# EAGLE board acciedent_vehicle _located_based_on_gps_and_gsm_vibration sensor (EAGLE 6.1)
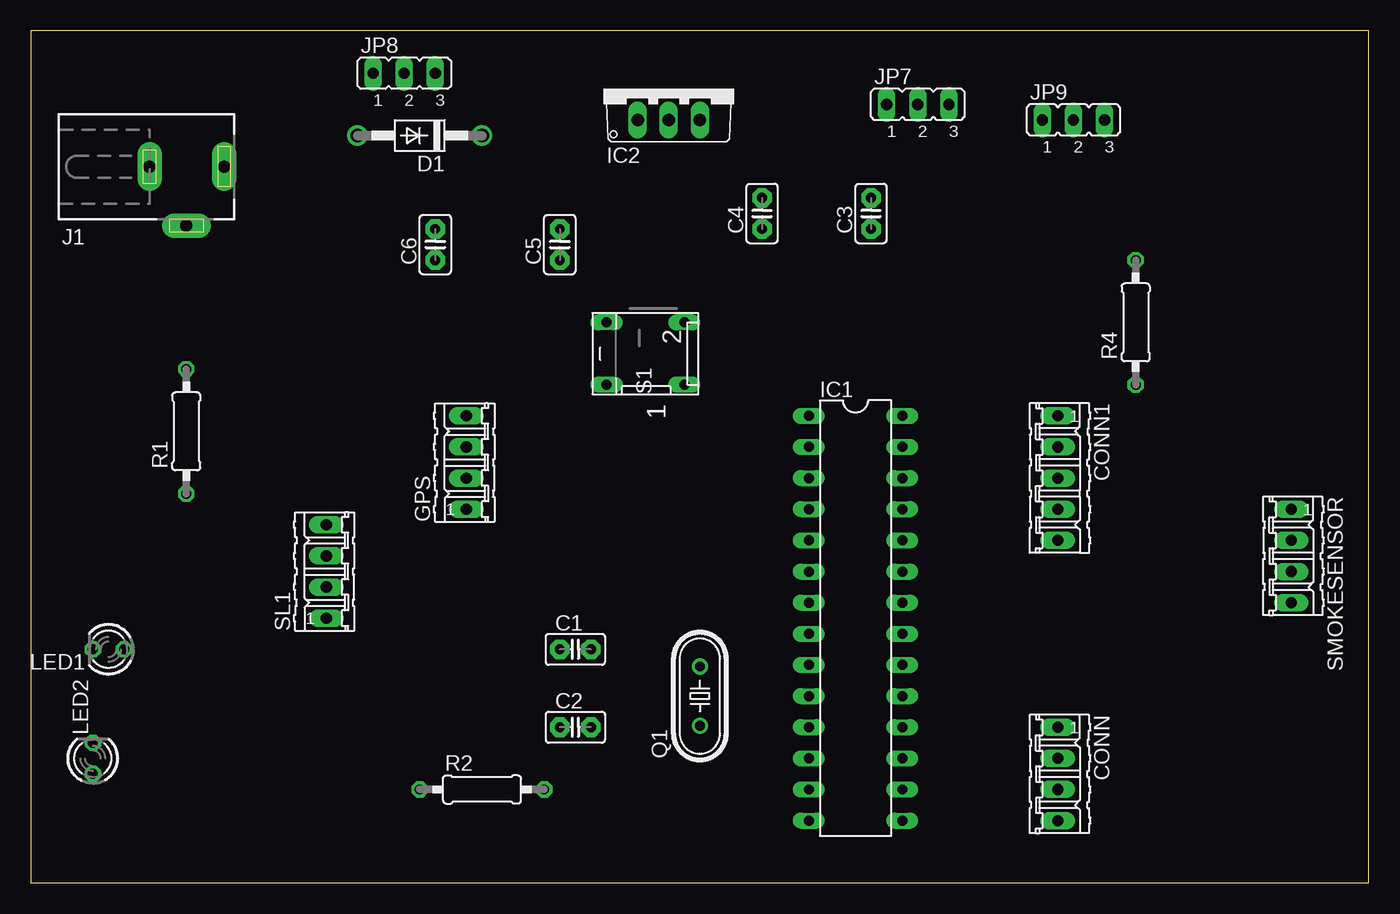
[diagram p0: board, top side]
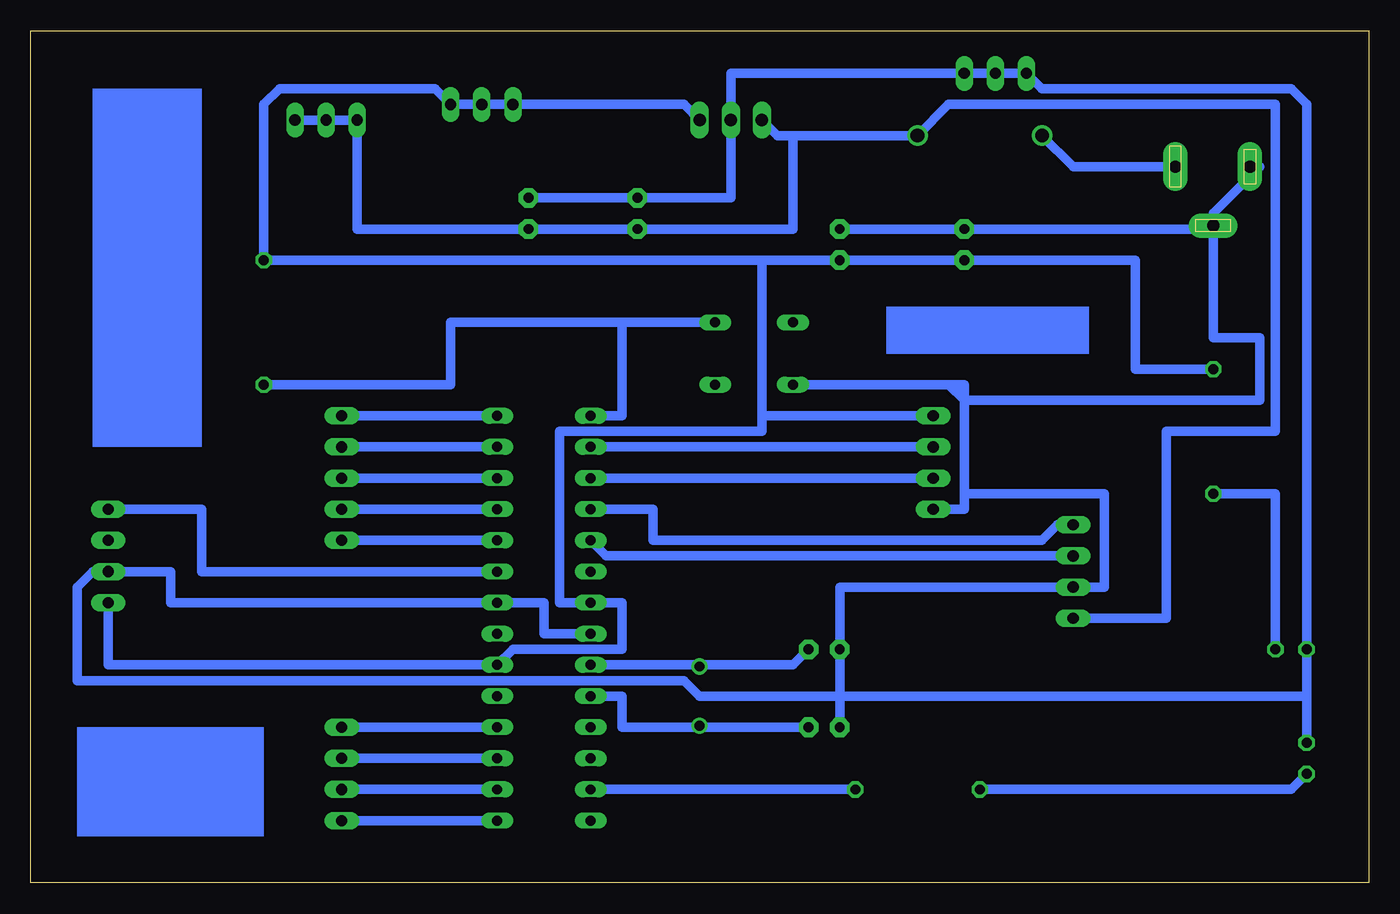
[diagram p1: board, bottom side, seen from below]

Size 109.2 x 69.52 mm. Coordinates in mm from the lower left corner, seen from the top.
Outline: 0,0 109.2,0 109.2,69.52 0,69.52 0,0
Copper layers (1*16): Top 0.035mm / dielectric 1.5mm / Bottom 0.035mm
Design rules: minimum track width 30mil, minimum drill 24mil, track to track 8mil, track to pad 8mil, pad to pad 8mil, via to via 8mil, smd to smd 8mil, copper to edge 40mil, drill to drill 8mil, minimum pad ring 10mil, minimum via ring 8mil, stop-mask expansion 4mil, vias tented up to drill 0mil, thermal gap 10mil

## Footprints (pad centres in the part's own frame; a part is rotated, then mirrored left to right if it is on the bottom)
C2.5-2 = drill 0.813 pad 1.6 octagon: 1 -1.27,0; 2 1.27,0
04P = drill 0.914 long: 1 -3.81,0; 2 -1.27,0; 3 1.27,0; 4 3.81,0
05P = drill 0.914 long: 1 -5.08,0; 2 -2.54,0; 3 0,0; 4 2.54,0; 5 5.08,0
DO41-10 = drill 1.118: A 5.08,0; C -5.08,0
DIL28-3 = drill 0.813 long: 1 -16.51,-3.81; 2 -13.97,-3.81; 3 -11.43,-3.81; 4 -8.89,-3.81; 5 -6.35,-3.81; 6 -3.81,-3.81; 7 -1.27,-3.81; 8 1.27,-3.81; 9 3.81,-3.81; 10 6.35,-3.81; 11 8.89,-3.81; 12 11.43,-3.81; 13 13.97,-3.81; 14 16.51,-3.81; 15 16.51,3.81; 16 13.97,3.81; 17 11.43,3.81; 18 8.89,3.81; 19 6.35,3.81; 20 3.81,3.81; 21 1.27,3.81; 22 -1.27,3.81; 23 -3.81,3.81; 24 -6.35,3.81; 25 -8.89,3.81; 26 -11.43,3.81; 27 -13.97,3.81; 28 -16.51,3.81
TO220V = drill 1.016 long: 1 -2.54,-2.54; 2 0,-2.54; 3 2.54,-2.54
DCJ0303 = drill 1 pad 2 long: 1 0,3.1; 2 4.8,0; 3 0,-3
JP2 = drill 0.914 long: 1 -2.54,0; 2 0,0; 3 2.54,0
LED3MM = drill 0.813 octagon: A -1.27,0; K 1.27,0
HC49/S = drill 0.813: 1 -2.413,0; 2 2.413,0
0207/10 = drill 0.813 octagon: 1 -5.08,0; 2 5.08,0
DP-02 = drill 0.813 long: 1 -2.54,-2.54; 2 2.54,-2.54; 3 2.54,3.81; 4 -2.54,3.81

## Placement (x,y rotation side)
C1  22pf  [C2.5-2]  44.45,19.05 0 top
C2  22pf  [C2.5-2]  44.45,12.7 0 top
C3  100UF  [C2.5-2]  68.58,54.61 90 top
C4  0.1uf  [C2.5-2]  59.69,54.61 90 top
C5  0.1uf  [C2.5-2]  43.18,52.07 90 top
C6  4.7uf  [C2.5-2]  33.02,52.07 90 top
CONN  [04P]  83.82,8.89 270 top
CONN1  [05P]  83.82,33.02 270 top
D1  1N4007  [DO41-10]  31.75,60.96 180 top
GPS  [04P]  35.56,34.29 90 top
IC1  ATMEGA328  [DIL28-3]  67.31,21.59 270 top
IC2  7805  [TO220V]  52.07,64.77 0 top
J1  [DCJ0303]  12.7,58.42 270 top
JP7  [JP2]  72.39,63.5 0 top
JP8  [JP2]  30.48,66.04 0 top
JP9  [JP2]  85.09,62.23 0 top
LED1  [LED3MM]  6.35,19.05 180 top
LED2  [LED3MM]  5.08,10.16 90 top
Q1  16MHZ  [HC49/S]  54.61,15.24 90 top
R1  220R  [0207/10]  12.7,36.83 90 top
R2  330R  [0207/10]  36.83,7.62 0 top
R4  10K  [0207/10]  90.17,45.72 90 top
S1  [DP-02]  50.8,43.18 90 top
SL1  GSM  [04P]  24.13,25.4 90 top
SMOKESENSOR  [04P]  102.87,26.67 270 top

## Library data of the parts
C1-C6 = capacitor-wima
CONN CONN1 GPS SL1 SMOKESENSOR = con-amp-quick; OC_FARNELL: unknown; OC_NEWARK: unknown
D1 = diode
IC1 = quantum-research-group; OC_FARNELL: unknown; OC_NEWARK: unknown
IC2 = linear
J1 = con-jack; OC_FARNELL: unknown; OC_NEWARK: unknown
JP7-JP9 = jumper
LED1 LED2 = led
Q1 = crystal; OC_FARNELL: 1667008; OC_NEWARK: unknown
R1 R2 R4 = rcl
S1 = switch-dil; MPN: MCDP02; OC_FARNELL: 1255233; OC_NEWARK: 26M1095

## Nets
N$1: C1.2 IC1.9 Q1.2
N$2: C2.2 IC1.10 Q1.1
N$3: D1.A J1.1
N$4: C5.1 C6.1 GPS.4 IC1.7 IC1.20 IC2.3 JP7.1 JP7.2 JP7.3 R1.2 R4.2 SMOKESENSOR.4
N$5: C1.1 C2.1 C3.2 C4.2 C5.2 C6.2 GPS.1 IC1.8 IC1.22 IC2.2 J1.2 J1.3 JP8.1 JP8.2 JP8.3 LED1.K LED2.K S1.4 SL1.2 SMOKESENSOR.3
N$6: LED1.A R1.1
N$7: C3.1 C4.1 D1.C IC2.1 JP9.1 JP9.2 JP9.3 SL1.1
N$8: CONN1.1 IC1.28
N$9: CONN1.2 IC1.27
N$10: CONN1.3 IC1.26
N$11: CONN.1 IC1.18
N$12: CONN.2 IC1.17
N$13: IC1.23 SMOKESENSOR.1
N$14: IC1.5 SL1.3
N$15: GPS.3 IC1.2
N$16: GPS.2 IC1.3
N$17: IC1.4 SL1.4
N$18: CONN.3 IC1.16
N$19: CONN.4 IC1.15
N$20: CONN1.4 IC1.25
N$21: IC1.13 R2.2
N$22: CONN1.5 IC1.24
N$31: IC1.1 R4.1 S1.2
N$32: LED2.A R2.1

## Tracks (layer width: path | path; a pad name or v marks a point on that pad's centre or on a via)
N$1
  Bottom 0.762: IC1.9 54.61,17.78 | C1.2 46.99,17.78 54.61,17.78 | 54.61,17.78 Q1.2
N$2
  Bottom 0.762: C2.2 54.61,12.7 | IC1.10 60.96,15.24 60.96,13.97 60.96,12.7 54.61,12.7 | 54.61,12.7 Q1.1
N$3
  Bottom 0.762: D1.A 24.13,58.42 J1.1
N$4
  Bottom 0.762: SMOKESENSOR.4 102.87,17.78 IC1.20 69.85,19.05 60.96,19.05 60.96,22.86 IC1.7 66.04,22.86 66.04,36.83 49.53,36.83 49.53,38.1 | R1.2 19.05,41.91 19.05,50.8 C6.1 C5.1 49.53,50.8 | IC2.3 55.88,63.5 JP7.1 JP7.2 JP7.3 76.2,64.77 88.9,64.77 90.17,63.5 R4.2 49.53,50.8 | 49.53,38.1 GPS.4 | 49.53,50.8 49.53,38.1
N$5
  Bottom 0.762: C3.2 C4.2 52.07,55.88 IC2.2 52.07,66.04 JP8.3 JP8.2 JP8.1 26.67,64.77 6.35,64.77 5.08,63.5 LED1.K 5.08,15.24 | IC1.8 67.31,20.32 67.31,22.86 IC1.22 97.79,22.86 97.79,25.4 SMOKESENSOR.3 104.14,25.4 105.41,24.13 105.41,16.51 55.88,16.51 54.61,15.24 43.18,15.24 | C5.2 C6.2 12.7,53.34 | J1.3 8.89,58.42 12.7,54.61 J1.2 12.7,53.34 | 34.29,40.64 S1.4 | 33.02,39.37 34.29,40.64 | 33.02,31.75 33.02,30.48 GPS.1 | 33.02,31.75 33.02,39.37 | 5.08,15.24 LED2.K | 43.18,15.24 C1.1 43.18,24.13 SL1.2 21.59,24.13 21.59,31.75 33.02,31.75 | 43.18,15.24 C2.1 | 43.18,15.24 5.08,15.24 | 12.7,53.34 12.7,44.45 8.89,44.45 8.89,39.37 33.02,39.37 | 34.29,40.64 33.02,40.64 33.02,39.37
N$6
  Bottom 0.762: LED1.A 7.62,31.75 R1.1
N$7
  Bottom 0.762: JP9.3 JP9.2 JP9.1 82.55,53.34 C3.1 C4.1 46.99,53.34 46.99,54.61 46.99,60.96 | SL1.1 16.51,21.59 16.51,36.83 7.62,36.83 7.62,63.5 34.29,63.5 D1.C 46.99,60.96 | IC2.1 48.26,60.96 46.99,60.96
N$8
  Bottom 0.762: CONN1.1 IC1.28
N$9
  Bottom 0.762: CONN1.2 IC1.27
N$10
  Bottom 0.762: CONN1.3 IC1.26
N$11
  Bottom 0.762: CONN.1 IC1.18
N$12
  Bottom 0.762: CONN.2 IC1.17
N$13
  Bottom 0.762: IC1.23 95.25,25.4 95.25,26.67 95.25,30.48 100.33,30.48 SMOKESENSOR.1
N$14
  Bottom 0.762: IC1.5 62.23,26.67 SL1.3
N$15
  Bottom 0.762: GPS.3 IC1.2
N$16
  Bottom 0.762: GPS.2 IC1.3
N$17
  Bottom 0.762: IC1.4 58.42,30.48 58.42,27.94 55.88,27.94 26.67,27.94 25.4,29.21 SL1.4
N$18
  Bottom 0.762: CONN.3 IC1.16
N$19
  Bottom 0.762: CONN.4 IC1.15
N$20
  Bottom 0.762: CONN1.4 IC1.25
N$21
  Bottom 0.762: IC1.13 R2.2
N$22
  Bottom 0.762: CONN1.5 IC1.24
N$31
  Bottom 0.762: 60.96,45.72 60.96,38.1 IC1.1 | 60.96,45.72 S1.2 | R4.1 74.93,40.64 74.93,41.91 74.93,45.72 60.96,45.72
N$32
  Bottom 0.762: LED2.A 6.35,7.62 R2.1
(copper drawn outside any net)
  shapes: Bottom area x3